# Altium PCB PCB1.PcbDoc
Units mm, origin at the board's own origin, x right, y up, seen from the top; angles counter-clockwise.
Board outline 24.84 x 24.84 mm, 4 copper layers (Top Layer, Layer 1, Layer 2, Bottom Layer), stack 0.603 mm thick; 30 components, 19 nets, 93 pads, 275 vias.
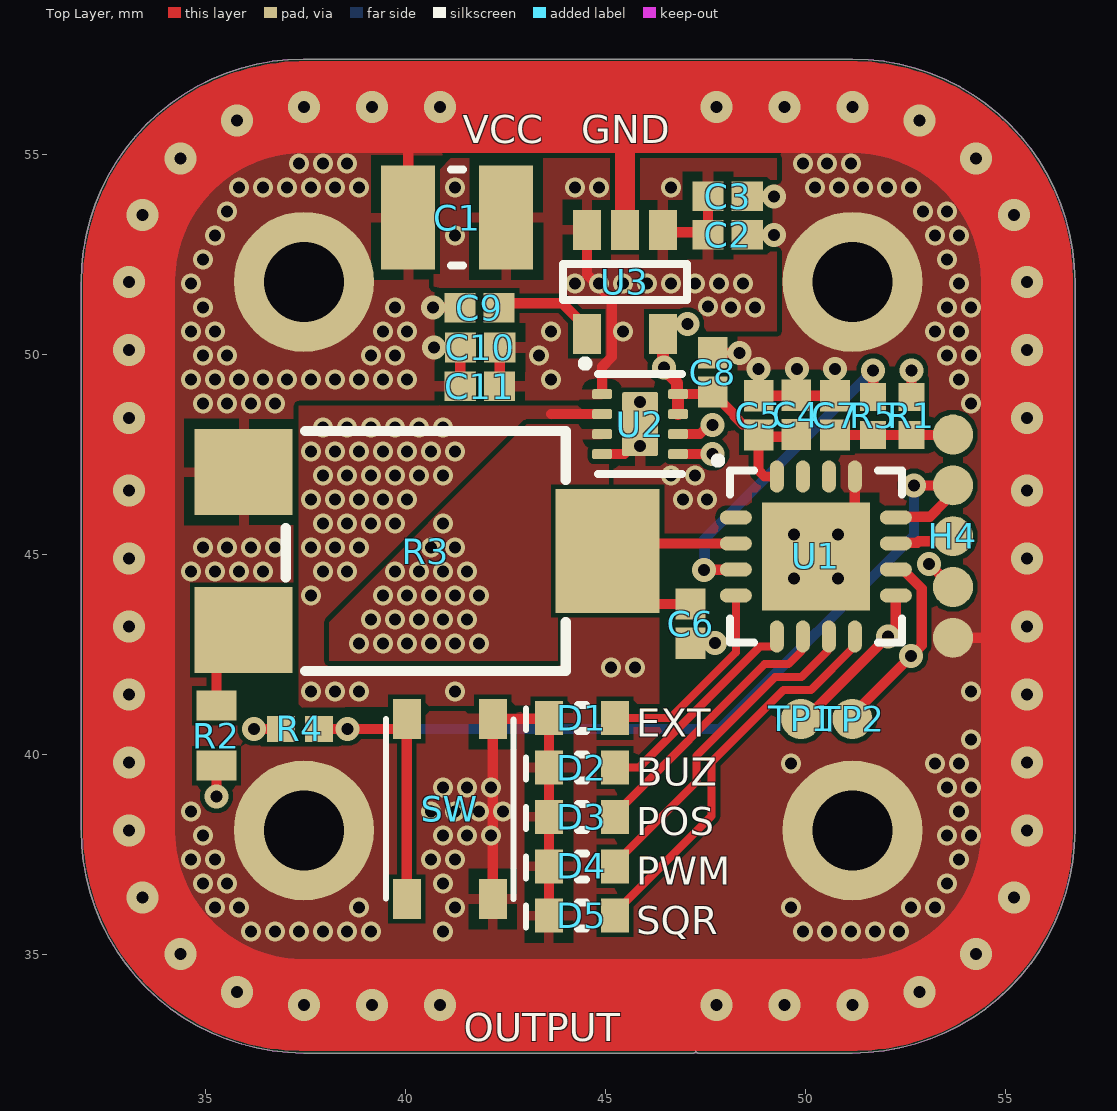
[diagram p0: Top Layer view]
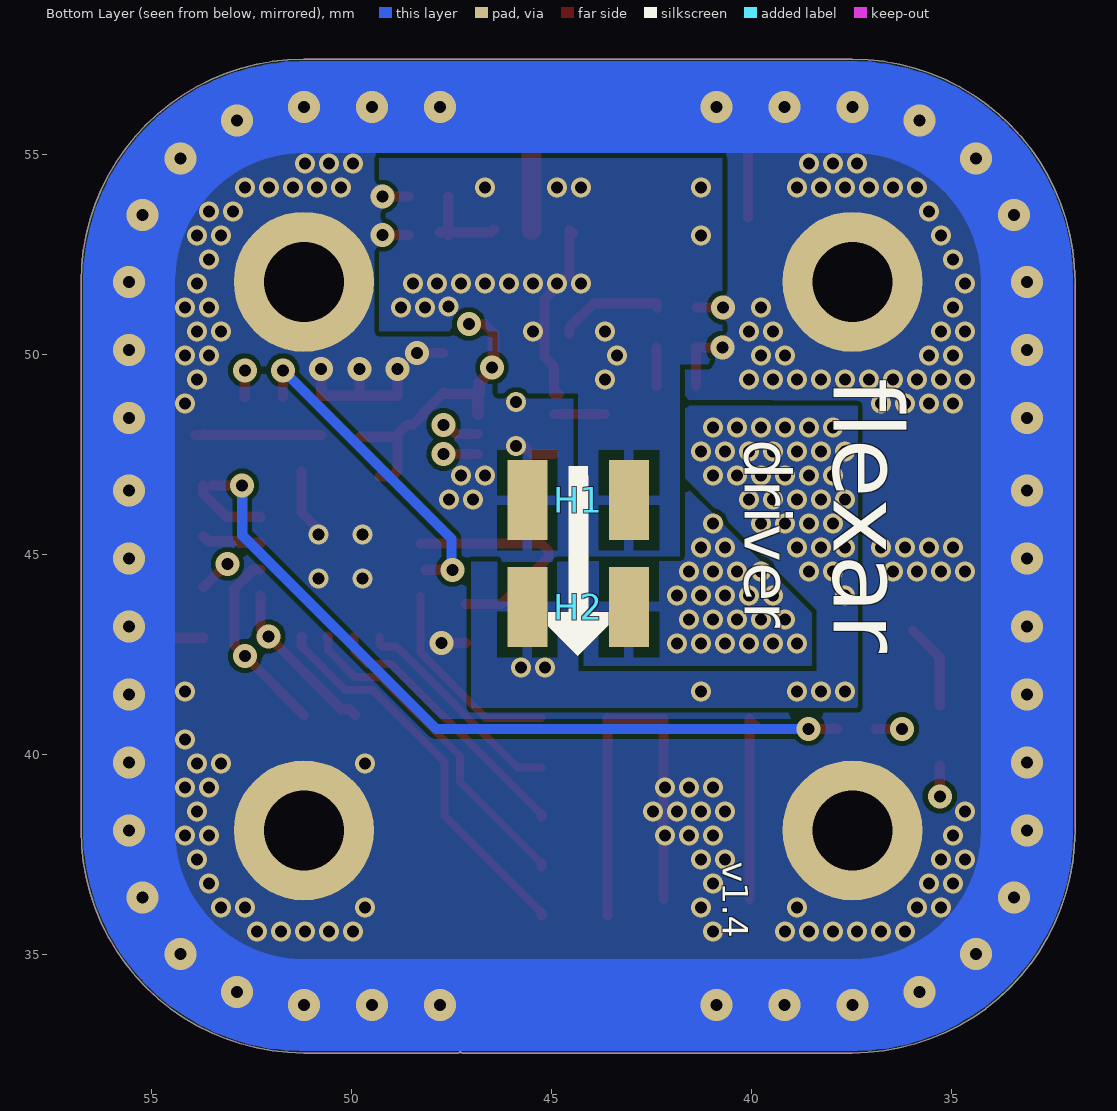
[diagram p1: Bottom Layer view, seen from below]
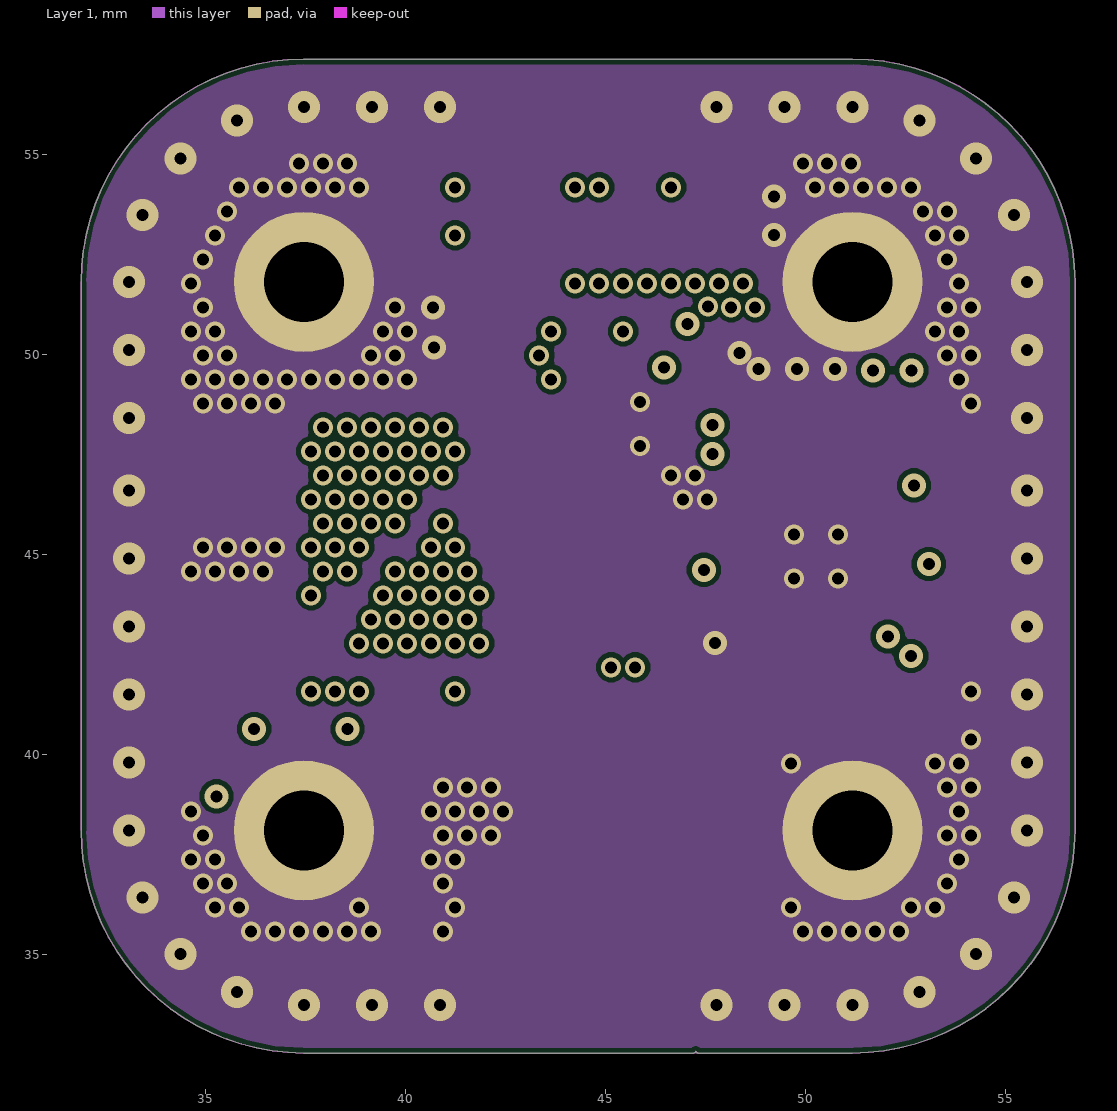
[diagram p2: Layer 1]
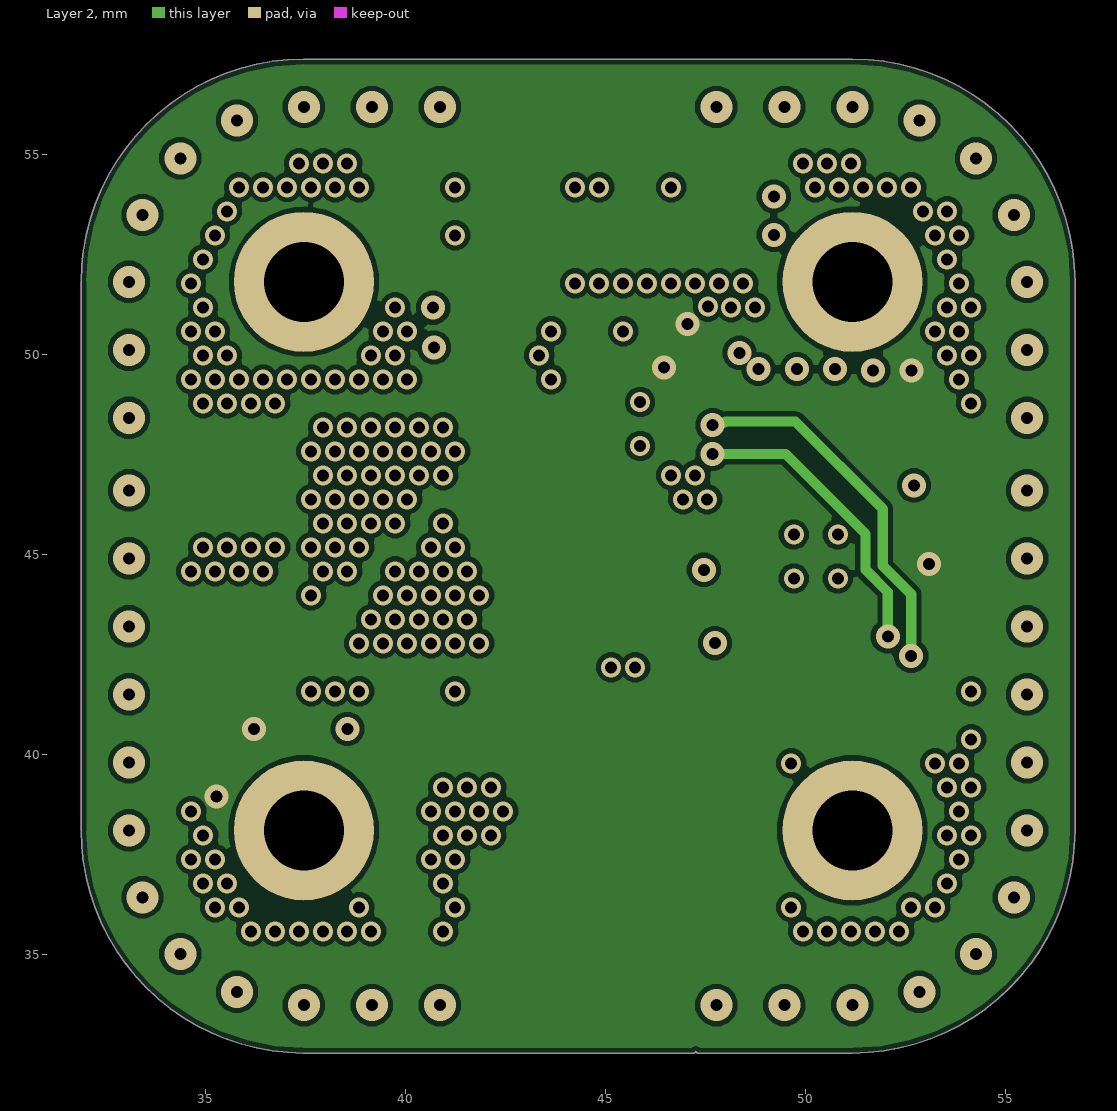
[diagram p3: Layer 2]

## Layer stack, top to bottom
Top Solder: solder mask 0.0102, Solder Resist, Dk 3.5
Top Layer: signal copper 0.0356
Dielectric 1: prepreg 0.0711, PP-006, Dk 4.1
Layer 1: signal copper 0.035
Dielectric: dielectric 0.32, FR-4, Dk 4.8
Layer 2: signal copper 0.035
Dielectric 2: prepreg 0.0711, PP-006, Dk 4.1
Bottom Layer: signal copper 0.0356
Bottom Solder: solder mask 0.0102, Solder Resist, Dk 3.5

## Board outline
37.468,32.537 cw(c37.468,38.103) 31.902,38.103 31.902,51.816 cw(c37.468,51.816) 37.468,57.382 51.181,57.382 cw(c51.181,51.816) 56.747,51.816 56.747,38.103 cw(c51.181,38.103) 51.181,32.537 47.319,32.537 cw(c47.319,32.588) 47.269,32.58 cw(c47.219,32.588) 47.219,32.537

## Design rules (kind name [scope] priority, off if disabled: settings)
Clearance [All] p1: gap=0.122 ignorepadtopadclearanceinfootprint=FALSE
PasteMaskExpansion [All] p1: expansion=-0.1
PlaneConnect [All] p1: planeconnectstyle=Relief reliefexpansion=0.3 reliefentries=4 reliefconductorwidth=0.25 reliefairgap=0.125
PolygonConnect [IsVia] p1: connectstyle=Direct reliefconductorwidth=0.3 reliefentries=4 polygonreliefangle="90 Angle" airgapwidth=0.15
PolygonConnect PolygonConnect_1 [IsRoundPad] p2: connectstyle=Direct reliefconductorwidth=0.3 reliefentries=4 polygonreliefangle="90 Angle" airgapwidth=0.15
PolygonConnect PolygonConnect_5 [All] p3: connectstyle=Relief reliefconductorwidth=0.254 reliefentries=4 polygonreliefangle="90 Angle" airgapwidth=0.254
RoutingVias [All] p1: holewidth=0.711 width=1.27 viastyle="Through Hole" minholewidth=0.3 minwidth=0.4 maxholewidth=5 maxwidth=5
SolderMaskExpansion [All] p1: expansion=0 istentingtop=FALSE
Width [All] p1: maxlimit=2 minlimit=0.152 preferedwidth=0.254
28 further rules are at their usual default settings.

## Components (designator, comment, footprint, x,y, rotation, side; value= is the part's Value field where it differs from the comment)
C1 "47uF" TAYO-C1210-2_L 41.302,53.423 r0 top
C2 "10nF" CAPC1005X56X25ML10T15 48.061,52.991 r180 top
C3 "100nF" CAPC1005X56X25ML10T15 48.061,53.953 r180 top
C4 "10nF" CAPC1005X56X25ML10T15 49.774,48.493 r270 top
C5 "100nF" CAPC1005X56X25ML10T15 48.837,48.478 r270 top
C6 "100nF" CAPC1005X56X25ML10T15 47.134,43.273 r90 top
C7 "100nF" CAPC1005X56X25ML10T15 50.747,48.478 r270 top
C8 "2.2uF" CAPC1005X56X25ML10T15 47.69,49.551 r270 top
C9 "100pF" CAPC1005X56X25ML10T15 41.859,51.171 r0 top
C10 "10nF" CAPC1005X56X25ML10T15 41.877,50.176 r0 top
C11 "100nF" CAPC1005X56X25ML10T15 41.867,49.21 r0 top
D1 "'LTST-C190KFKT" RESC1608X04N 44.419,40.908 r180 top
D2 "'LTST-C190KFKT" RESC1608X04N 44.419,39.674 r180 top
D3 "'LTST-C190KFKT" RESC1608X04N 44.419,38.44 r180 top
D4 "'LTST-C190KFKT" RESC1608X04N 44.419,37.206 r180 top
D5 "'LTST-C190KFKT" RESC1608X04N 44.419,35.972 r180 top
H1 "'BG300-02-A-L-A" BG300-02-A-L-A 45.485,45.163 r180 bottom
H2 "'BG300-02-A-L-A" BG300-02-A-L-A 43.167,44.886 r0 bottom
H4 "H5P1.27" H5P1.27P 53.696,45.458 r270 top
R1 "10k" RESC1005X40X25ML5T10 52.658,48.463 r270 top
R2 "150 (0.33W)" FP-CRCW0603-HPe3-MFG 35.284,40.471 r270 top
R3 "N6L50T0S-503A3030R-E" N6L50T0S-503A3030R-E 40.513,45.085 r180 top
R4 "10k" RESC1005X40X25ML5T10 37.368,40.64 r180 top
R5 "150" RESC1005X40X25ML05T10 51.702,48.463 r90 top
SW "PTS815 SJK 250 SMTR LFS" "PTS815 SJK 250 SMTR LFS" 39.818,38.78 r270 top
TP1 "TESTPAD" TESTPAD 49.897,40.889 r270 top
TP2 "TESTPAD" TESTPAD 51.181,40.889 r270 top
U1 "PIC16F18323-I/JQ" PIC16F18323-I/JQ 50.267,44.95 r0 top
U2 "DRV8837DSGR" FP-DSG0008A-MFG 45.874,48.26 r0 top
U3 "'AP2210K-3.3TRG1" SOT95P282X145-5N 45.493,51.816 r270 top

## Footprints (in the part's own frame and the unit in brackets; to place one, negate y for a bottom-side part, rotate by r counter-clockwise, add the part's x,y. Pads: shape width x height; smd on the part's side, far side on the other; paste and mask are expansions set on the pad)
BG300-02-A-L-A [mm]
  rect 1x2 smd: 1(-0.111,1.195) 2(2.429,1.195)
  body extent -1.71,0.21 3.92,12.16, height 2.5
CAPC1005X56X25ML10T15 [mm] "Chip Capacitor, 2-Leads, Body 1.00x0.50mm, IPC Low Density"
  rect 0.78x0.74 smd: 1(-0.49,0) 2(0.49,0)
  body extent -0.55,-0.3 0.55,0.3, height 0.56
FP-CRCW0603-HPe3-MFG [mm]
  rect 0.75x1 smd paste+0 mask+0: 1(-0.75,0) 2(0.75,0)
  body extent -1.22,-0.6 1.22,0.6, height 0.25
FP-DSG0008A-MFG [mm]
  rrect40% 0.5x0.25 smd paste+0 mask+0: 1(-0.95,0.75) 2(-0.95,0.25) 3(-0.95,-0.25) 4(-0.95,-0.75) 5(0.95,-0.75) 6(0.95,-0.25) 7(0.95,0.25) 8(0.95,0.75)
  rrect11% 0.9x1.6 smd paste-1000 mask+0: 9(0,0)
  silkscreen extent -1.45,-1.25 1.05,1.59, body extent -1.3,-1.15 1.3,1.15, height 0.25
H5P1.27P [mm]
  round 1 smd: 1(-2.54,0) 2(-1.27,0) 3(0,0) 4(1.27,0) 5(2.54,0)
N6L50T0S-503A3030R-E [mm]
  rect 2.6x3.1 smd: 1(-4.55,0)
  rect 2.45x2.15 smd: 2(4.55,1.975) 3(4.55,-1.975)
  silkscreen extent -3.5,-3 3.5,3, body extent -3.63,-3.13 3.62,3.13, height 6.2
PIC16F18323-I/JQ [mm] "QFN, 16-Leads, Body 4.00x4.00mm, Pitch 0.65mm, Thermal Pad 2.70x2.70mm, IPC Medium Density"
  oval 0.8x0.35 smd: 1(-2,0.975) 2(-2,0.325) 3(-2,-0.325) 4(-2,-0.975) 9(2,-0.975) 10(2,-0.325) 11(2,0.325) 12(2,0.975)
  oval 0.35x0.8 smd: 5(-0.975,-2) 6(-0.325,-2) 7(0.325,-2) 8(0.975,-2) 13(0.975,2) 14(0.325,2) 15(-0.325,2) 16(-0.975,2)
  rect 2.7x2.7 smd: 17(0,0)
  silkscreen extent -2.53,-2.15 2.15,2.48, body extent -2,-2 2,2, height 0.55
"PTS815 SJK 250 SMTR LFS" [mm]
  rect 1x0.7 smd: 1(-2.109,2.373) 1(2.391,2.373) 2(-2.109,0.223) 2(2.391,0.223)
  silkscreen extent -2.11,-0.3 2.39,2.89, body extent -2.08,-0.3 2.42,2.9, height 2.4
RESC1005X40X25ML5T10 [mm] "Chip Resistor, 2-Leads, Body 1.05x0.55mm, IPC Low Density"
  rect 0.7x0.65 smd: 1(-0.475,0) 2(0.475,0)
  body extent -0.53,-0.28 0.53,0.28, height 0.4
RESC1005X40X25ML05T10 [mm] "Chip Resistor, 2-Leads, Body 1.00x0.50mm, IPC Low Density"
  rect 0.7x0.65 smd: 1(-0.475,0) 2(0.475,0)
  body extent -0.53,-0.27 0.53,0.28, height 0.4
RESC1608X04N [mm] "Chip Resistor, 2-Leads, Body 1.60x0.80mm, IPC Medium Density"
  rect 0.7x0.85 smd: 1(-0.825,0) 2(0.825,0)
  silkscreen extent -0.1,-0.33 0.1,0.33, body extent -0.8,-0.4 0.8,0.4, height 0.4
SOT95P282X145-5N [mm] "SOT23, 5-Leads, Body 2.96x2.83mm, Pitch 0.95mm, IPC Medium Density"
  rect 1x0.7 smd: 1(-1.3,0.95) 2(-1.3,0) 3(-1.3,-0.95) 4(1.3,-0.95) 5(1.3,0.95)
  silkscreen extent -0.45,-1.55 0.45,1.55, body extent -0.85,-1.55 0.85,1.55, height 1.45
TAYO-C1210-2_L [mm] "Chip Capacitor, 2-Leads, Body 3.50x2.70mm, IPC High Density"
  rect 1.35x2.6 smd: 1(-1.225,0) 2(1.225,0)
  silkscreen extent -0.15,-1.2 0.15,1.2, body extent -1.75,-1.35 1.75,1.35, height 2.7
TESTPAD [mm]
  round 1 smd paste-5: 1(0,0)

## Part data
C1: library part CMP-2000-06559-1, "'CL32A476KOJNNNE", Capacitance=47µF, Manufacturer="Taiyo Yuden", Operating Temperature=-55°C~125°C, Package / Case=1210(3225Metric), Package Description="2-Pin Surface Mount Device, Body 3.2 x 2.5 mm, Height 2.7 mm", Package Reference=C1210, Ratings=-, Standard Package=1, Temperature Coefficient=X7R, Tolerance=±20%, Voltage - Rated=10V, Applications=GeneralPurpose, Category=Capacitors, Datasheet URL=https://datasheet.ciiva.com/142/lmk325b7476mm-tr-ss-142765.pdf, Datasheet Version=10/2014, Family=CeramicCapacitors, Features=-, Height - Seated (Max)=-, Lead Spacing=-, Lead Style=-, Manufacturer URL=http://www.t-yuden.com/, Mounting Technology=SurfaceMount, Mounting Type=SurfaceMount,MLCC, Online Catalog=MSeries, Other Names=587-2783-6, Packaging=Digi-Reel®, Series=M, Size / Dimension="0.126\"Lx0.098\"W(3.20mmx2.50mm)", Thickness (Max)="0.106\"(2.70mm)"
C2 C4 C10: library part CMP-2008-02799-1, "'04025C103MAT2A", Manufacturer="AVX Interconnect / Elco", Part Number=0402YC103MAT2A
C3 C5 C6 C7 C11: library part CMP-2008-02800-1, "'CL05B104KA5NNNC", Manufacturer="AVX Interconnect / Elco", Part Number=0402YC104KAT2A
C8: library part CMP-2008-02800-1, "'LMK105BJ225MV-F", Manufacturer="AVX Interconnect / Elco", Part Number=0402YC104KAT2A
C9: library part CMP-2008-02799-1, "'CC0402KRX7R9BB101", Manufacturer="AVX Interconnect / Elco", Part Number=0402YC103MAT2A
D1 D2 D3 D4 D5: library part LED
H1 H2: library part H2P2.54
R1 R4: library part CMP-2002-07915-2, "'RC0402JR-0710KL", Case Code (Imperial)=0402, Case Code (Metric)=1005, Max Operating Temperature="155 degC", Min Operating Temperature="-55 degC", Package Quantity=10000, Power Rating="63 mW", Resistance="10 kohm", Tolerance=5%, Voltage Rating="50 V", Case\Package=0402, ComponentLink1Description="Manufacturer URL", ComponentLink1URL=http://www.yageo.com/, ComponentLink2Description=Datasheet, ComponentLink2URL=http://www.yageo.com/documents/recent/PYu-RC_Group_51_RoHS_L_04.pdf, DatasheetVersion="Rev. 4, 02/2016", Height="0.35 mm", Length="1 mm", Mount="Surface Mount", Mounting Technology="Surface Mount", PackageDescription="2-Pin Surface Mount Device, Body 1 x 0.5 mm", PackageReference=0402, Packaging="Tape and Reel", Pins=2, REACH SVHC="No SVHC", RoHSCompliant=true, Voltage Rating (DC)="50 V", Width="0.5 mm"
R2: library part CMP-02407-010710-1, "'CRCW0603150RJNEAHP", Case Code (Imperial)=0603, Case Code (Metric)=1608, Max Operating Temperature=155°C, Max Power Dissipation=250mW, Min Operating Temperature=-55°C, Package Quantity=1, Resistance=150R, Temperature Coefficient=100ppm/°C, Tolerance=1%, Voltage Rating=75V, Case/Package=0603, Composition="Thick Film", Contact Plating=Tin, Depth=0.85mm, Features="Automotive AEC-Q200", Height=0.45mm, Lead Free="Lead Free", Length=1.55mm, Military Standard=Not, Mount="Surface Mount", Number of Terminations=2, Packaging="Tape and Reel", Power Rating=250mW, Radiation Hardening=No, Termination=SMD/SMT, Voltage Rating (DC)=75V, Weight=7.1E-05oz, Width=0.033inch
R5: library part CMP-2002-07401-1, "'RC0402FR-07150RL", Manufacturer="Yageo / Phycomp", Part Number=RC0402FR-07150RL
U2: library part CMP-04915-000004-1, "IC MOTOR DRIVER PAR 8WSON", Ambient Temperature Range High=+85°C, Ambient Temperature Range Low=-40°C, Manufacturer="Texas Instruments", Max Junction Temp=+150°C, Max Supply Voltage=7V, Min Supply Voltage=1.8V, Nominal Supply Current=300-700uA, Output Current=1.8A, Output Voltage=0-11V, Package=DSG0008A, Switching Frequency=0-250kHz, Temperature="-40°C to +85°C", Automotive=No, Category=IC, ComponentLink2Description=Datasheet, ComponentLink2URL=http://www.ti.com/lit/ds/symlink/drv8837.pdf, Device Class L1="Integrated Circuits (ICs)", Device Class L2="Power Management ICs", Device Class L3="Motor Drivers", Digikey Description="IC MOTOR DRIVER PAR 8WSON", Height=0.8mm, Lead Free=Yes, Manufacturer Part Number=DRV8837DSGR, Motor Type=Brushed, Mouser Description="Motor / Motion / Ignition Controllers & Drivers 1.8A Low Vltg Brush DC Motor Driver", Number Of Outputs=2, Octopart=https://octopart.com/drv8837dsgr-texas+instruments-23786726, RoHS=TRUE, Standoff Height=0mm, Temperature Range High=+85°C, Temperature Range Low=-40°C
U3: library part AP2210K-3.0TRG1

## Free pads (board coordinates)
  round 3.5 hole 2 mask+0: ""(37.468,38.103) ""(37.468,51.816) ""(51.181,38.103) ""(51.181,51.816)

## Via types
v1: diameter 0.5, hole 0.3, Top Layer to Bottom Layer, tented both sides, 204 vias
v2: diameter 0.8, hole 0.3, Top Layer to Bottom Layer, 42 vias
v3: diameter 0.6, hole 0.3, Top Layer to Bottom Layer, tented both sides, 23 vias
v4: diameter 0.5, hole 0.3, Top Layer to Bottom Layer, tented bottom, 6 vias

## Nets (pads, with @x,y where several pads share a name; then routed paths per layer and width w, separated by ;. In a path a pad name is that pad's centre, name@x,y a point inside that pad or via, vN(x,y) a via of type N, cw(c..) or ccw(c..) an arc to the next point about the centre after c; other vN are vias at no path point)
GND: C1.1 C2.1 C3.1 C4.1 C5.1 C6.1 C7.1 C8.1 C9.1 C10.1 C11.1 D1.2 D2.2 D3.2 D4.2 D5.2 H1.1 H4.5 pad. R3.3 SW.1 U1.13 U1.17 U2.4 U2.9 U3.2 | length 196.5
  Top Layer w0.254: v2(33.099,48.416) 33.919,49.236 ; pad.@37.368,38.103 pad.@37.368,38.242 ; C1.1 40.077,55.394 v2(40.868,56.186) ; v3(40.702,51.171) C9.1 ; v3(40.72,50.176) C10.1 41.377,50.165 C11.1 ; SW.1@42.191,36.389 42.191,40.889 43.575,40.889 D1.2 D2.2 D3.2 D4.2 D5.2 ; U2.4 44.926,47.512 45.476,47.512 45.674,47.71 v4(45.874,47.71) ; 45.493,55.962 45.716,56.186 ; C6.1 v3(47.745,42.783) ; C8.1 v3(48.357,50.041) ; C2.1 v3(49.218,52.991) ; C3.1 v3(49.218,53.953) ; v3(48.837,49.635) C5.1 C4.1@49.792,48.968 ; v3(49.792,49.635) C4.1@49.792,48.968 ; C7.1@50.731,48.985 C7.1 ; v3(50.747,49.635) C7.1 ; U1.17@50.817,45.627 51.242,46.052 U1.13 U1.13@51.242,47.077 ; H4.5 55.118,42.918 55.403,43.203 v2(55.551,43.203) ; C4.1@49.792,48.968 C7.1
  Top Layer w0.5: U3.2 45.493,55.962
  Top Layer w2.3: v2(33.099,38.103) ccw(c37.468,38.103) v2(37.468,33.734) v2(51.181,33.734) ccw(c51.181,38.103) v2(55.551,38.103) v2(55.551,39.803) v2(55.551,41.503) v2(55.551,43.203) v2(55.551,44.903) v2(55.551,46.603) v2(55.551,48.416) v2(55.551,50.116) v2(55.551,51.816) ccw(c51.181,51.816) v2(51.181,56.186) v2(49.481,56.186) v2(47.781,56.186) 45.716,56.186 v2(40.868,56.186) v2(39.168,56.186) v2(37.468,56.186) ccw(c37.468,51.816) v2(33.099,51.816) v2(33.099,50.116) v2(33.099,48.416) v2(33.099,46.603) v2(33.099,44.903) v2(33.099,43.203) v2(33.099,41.503) v2(33.099,39.803) v2(33.099,38.103)
  Bottom Layer w2.3: v2(33.099,38.103) ccw(c37.468,38.103) v2(37.468,33.734) v2(51.181,33.734) ccw(c51.181,38.103) v2(55.551,38.103) v2(55.551,39.803) v2(55.551,41.503) v2(55.551,43.203) v2(55.551,44.903) v2(55.551,46.603) v2(55.551,48.416) v2(55.551,50.116) v2(55.551,51.816) ccw(c51.181,51.816) v2(51.181,56.186) v2(49.481,56.186) v2(47.781,56.186) v2(40.868,56.186) v2(39.168,56.186) v2(37.468,56.186) ccw(c37.468,51.816) v2(33.099,51.816) v2(33.099,50.116) v2(33.099,48.416) v2(33.099,46.603) v2(33.099,44.903) v2(33.099,43.203) v2(33.099,41.503) v2(33.099,39.803) v2(33.099,38.103)
  other v1: 36.153,35.58 36.753,35.58 37.353,35.58 37.953,35.58 38.553,35.58 39.153,35.58 40.953,35.58 49.953,35.58 50.553,35.58 51.153,35.58 51.753,35.58 52.353,35.58 35.253,36.18 35.853,36.18 38.853,36.18 41.253,36.18 49.653,36.18 52.653,36.18 53.253,36.18 34.953,36.78 35.553,36.78 40.953,36.78 53.553,36.78 34.653,37.38 35.253,37.38 40.653,37.38 41.253,37.38 53.853,37.38 34.953,37.98 40.953,37.98 41.553,37.98 42.153,37.98 53.553,37.98 54.153,37.98 34.653,38.58 40.653,38.58 41.253,38.58 41.853,38.58 42.453,38.58 53.853,38.58 40.953,39.18 41.553,39.18 42.153,39.18 53.553,39.18 54.153,39.18 49.653,39.78 53.253,39.78 53.853,39.78 54.153,40.38 54.153,41.58 34.653,44.58 35.253,44.58 35.853,44.58 36.453,44.58 34.953,45.18 35.553,45.18 36.153,45.18 36.753,45.18 46.953,46.38 47.553,46.38 46.653,46.98 47.253,46.98 34.953,48.78 35.553,48.78 36.153,48.78 36.753,48.78 54.153,48.78 34.653,49.38 35.253,49.38 35.853,49.38 36.453,49.38 37.053,49.38 37.653,49.38 38.253,49.38 38.853,49.38 39.453,49.38 40.053,49.38 53.853,49.38 34.953,49.98 35.553,49.98 39.153,49.98 39.753,49.98 53.553,49.98 54.153,49.98 34.653,50.58 35.253,50.58 39.453,50.58 40.053,50.58 53.253,50.58 53.853,50.58 34.953,51.18 39.753,51.18 53.553,51.18 54.153,51.18 34.653,51.78 53.853,51.78 34.953,52.38 53.553,52.38 35.253,52.98 53.253,52.98 53.853,52.98 35.553,53.58 52.953,53.58 53.553,53.58 35.853,54.18 36.453,54.18 37.053,54.18 37.653,54.18 38.253,54.18 38.853,54.18 50.253,54.18 50.853,54.18 51.453,54.18 52.053,54.18 52.653,54.18 37.353,54.78 37.953,54.78 38.553,54.78 49.953,54.78 50.553,54.78 51.153,54.78
  other v2: 39.168,33.734 40.868,33.734 47.781,33.734 49.481,33.734 35.796,34.066 52.853,34.066 34.378,35.013 54.271,35.013 33.431,36.431 55.218,36.431 33.431,53.488 55.218,53.488 34.378,54.906 54.271,54.906 35.796,55.853 52.853,55.853
  other v4: 49.717,44.4 50.817,44.4 49.717,45.5 50.817,45.5 45.874,48.81
NetC6_2: C6.2 R3.1 U1.2 | length 6
  Top Layer w0.254: C6.2 46.236,43.763 45.063,44.936 R3.1 45.253,45.275 U1.2
NetC7_2: C7.2 H4.1 R1.2 R5.1 | length 3.2
  Top Layer w0.254: C7.2 R5.1 R1.2 H4.1@53.892,47.988 ; H4.1 53.689,48.005 H4.1@53.696,48.005
NetC9_2: C9.2 U3.4 | length 2.6
  Top Layer w0.254: C9.2@42.349,51.282 43.927,51.282 44.543,50.666 U3.4
NetD1_1: D1.1 U1.4 | length 5.1
  Top Layer w0.2: D1.1 46.625,40.908 48.267,42.55 U1.4
NetD2_1: D2.1 U1.5 | length 5.5
  Top Layer w0.2: D2.1 45.846,39.674 48.868,42.696 49.223,42.696 49.292,42.766 U1.5
NetD3_1: D3.1 U1.6 | length 6.8
  Top Layer w0.2: D3.1@45.244,38.515 48.987,42.258 49.584,42.258 49.913,42.587 49.913,42.921 U1.6
  Top Layer w0.254: D3.1 D3.1@45.244,38.515
NetD4_1: D4.1 U1.7 | length 8.3
  Top Layer w0.2: D4.1@45.244,37.281 47.283,39.32 47.283,39.967 49.253,41.936 49.912,41.936 50.574,42.598 U1.7@50.574,42.932
  Top Layer w0.254: D4.1 D4.1@45.244,37.281 ; U1.7@50.574,42.932 U1.7
NetD5_1: D5.1 U1.8 | length 9.9
  Top Layer w0.2: D5.1@45.244,36.047 47.659,38.462 47.659,39.811 49.463,41.614 50.147,41.614 U1.8@51.242,42.709
  Top Layer w0.254: D5.1 D5.1@45.244,36.047 ; U1.8@51.242,42.709 U1.8
NetH2_1: H2.1 U2.3
  other v1: 38.853,42.78 39.453,42.78 40.053,42.78 40.653,42.78 41.253,42.78 41.853,42.78 39.153,43.38 39.753,43.38 40.353,43.38 40.953,43.38 41.553,43.38 39.453,43.98 40.053,43.98 40.653,43.98 41.253,43.98 41.853,43.98 39.753,44.58 40.353,44.58 40.953,44.58 41.553,44.58 40.653,45.18 41.253,45.18 40.953,45.78
NetH2_2: H2.2 U2.2 | length 1.3
  Top Layer w0.254: 43.653,48.51 U2.2
  other v1: 37.653,41.58 38.253,41.58 38.853,41.58 41.253,41.58 45.153,42.18 45.753,42.18 37.653,43.98 37.953,44.58 38.553,44.58 37.653,45.18 38.253,45.18 38.853,45.18 37.953,45.78 38.553,45.78 39.153,45.78 39.753,45.78 37.653,46.38 38.253,46.38 38.853,46.38 39.453,46.38 40.053,46.38 37.953,46.98 38.553,46.98 39.153,46.98 39.753,46.98 40.353,46.98 40.953,46.98 37.653,47.58 38.253,47.58 38.853,47.58 39.453,47.58 40.053,47.58 40.653,47.58 41.253,47.58 37.953,48.18 38.553,48.18 39.153,48.18 39.753,48.18 40.353,48.18 40.953,48.18
NetH4_2: H4.2 R4.1 SW.2 U1.12 | length 26.9
  Top Layer w0.254: R4.1 R4.1@37.893,40.64 ; R4.1@37.91,40.657 R4.1@37.893,40.64 ; SW.2@40.041,36.389 SW.2@40.041,40.863 ; SW.2@40.041,40.889 SW.2@40.041,40.863 ; U1.12 52.285,45.943 53.122,45.943 53.271,46.092 53.271,46.101 53.696,46.526 H4.2 ; v3(52.722,46.728) H4.2@53.483,46.728 ; R4.1@37.893,40.64 v3(38.56,40.64) 39.818,40.64 SW.2@40.041,40.863
  Bottom Layer w0.254: v3(38.56,40.64) 47.879,40.64 52.722,45.483 v3(52.722,46.728)
NetH4_3: H4.3 U1.11 | length 1.5
  Top Layer w0.254: U1.11 52.285,45.293 52.801,45.293 52.84,45.332 53.57,45.332 H4.3
NetR2_1: R2.1 R3.2 | length 2.2
  Top Layer w0.254: R2.1 35.284,42.431 R3.2@35.953,43.1
NetR5_2: R5.2 U1.3 | length 8.1
  Top Layer w0.254: v3(47.468,44.618) U1.3@48.135,44.618 ; R5.2 v3(51.702,49.605)
  Bottom Layer w0.254: v3(47.468,44.618) 47.49,44.639 47.49,45.393 v3(51.702,49.605)
NetTP1_1: TP1.1 U1.9 U2.5 | length 12.4
  Top Layer w0.254: U2.5 47.683,47.51 v3(47.688,47.515) ; TP1.1@49.897,40.989 50.04,41.132 50.249,41.132 v3(52.067,42.95) 52.267,43.15 U1.9
  Layer 2 w0.254: v3(47.688,47.515) 49.508,47.515 51.512,45.511 51.512,44.616 52.067,44.061 v3(52.067,42.95)
NetTP2_1: TP2.1 U1.10 U2.6 | length 14.9
  Top Layer w0.254: U2.6 46.826,48.012 47.371,48.012 47.596,48.237 v3(47.69,48.237) ; TP2.1@51.181,40.989 v3(52.653,42.461) 52.916,42.724 52.916,44.151 52.51,44.556 52.51,44.581 52.466,44.625 U1.10
  Layer 2 w0.254: v3(47.69,48.237) 47.756,48.303 47.988,48.303 48.011,48.326 49.757,48.326 51.942,46.141 51.942,44.718 52.653,44.007 v3(52.653,42.461)
VCC: C1.2 C2.2 C3.2 C10.2 C11.2 H1.2 U2.1 U3.1 U3.3 | length 7.9
  Top Layer w0.254: C11.2 42.367,49.22 C10.2 ; U3.3@44.46,53.033 U3.3 44.543,52.004 45.166,51.381 45.166,49.937 44.924,49.695 44.924,49.386 U2.1@44.924,49.133 ; U2.1@44.801,49.012 44.803,49.01 U2.1 ; U3.1@46.433,53.126 U3.1 46.502,53.057 C2.2@47.571,53.057 ; C2.2 C2.2@47.571,53.057 ; C3.2 C2.2@47.571,53.057 ; C2.2@47.783,53.057 C2.2@47.571,53.057
  other v1: 43.653,49.38 43.353,49.98 43.653,50.58 45.453,50.58 48.153,51.18 48.753,51.18 47.57,51.195 44.253,51.78 44.853,51.78 45.453,51.78 46.053,51.78 46.653,51.78 47.253,51.78 47.853,51.78 48.453,51.78 41.253,52.98 41.253,54.18 44.253,54.18 44.853,54.18 46.653,54.18
VDD: C4.2 C5.2 C8.2 H4.4 R1.1 R2.2 R4.2 U1.16 U2.7 U2.8 U3.5 | length 11.7
  Top Layer w0.254: v3(35.284,38.954) R2.2 ; v3(36.226,40.64) R4.2 R4.2@36.877,40.623 ; U3.5@46.443,50.441 46.459,50.425 46.459,49.69 v3(46.476,49.673) ; U3.5 46.443,50.539 46.666,50.762 v3(47.057,50.762) ; U2.7 U2.7@46.826,48.508 ; U2.8 47.638,49.01 C8.2 47.69,49.041 48.218,48.513 48.218,48.485 48.239,48.464 48.239,48.455 48.442,48.251 48.594,48.251 48.837,48.008 C5.2 C5.2@48.837,47.943 ; U1.16 48.986,46.95 48.837,47.099 C5.2@48.837,47.943 ; C4.2@49.774,47.943 C5.2@48.837,47.943 ; R1.1 v3(52.658,49.605) ; v3(53.091,44.762) 53.106,44.762 53.681,44.188 H4.4
  Top Layer w0.3: U3.5 46.443,49.649 46.799,49.293 46.799,49.035 U2.8 U2.7
  Bottom Layer w0.254: v3(35.284,38.954) v3@35.315,38.985
  Bottom Layer w0.3: v3@53.051,44.762 v3(53.091,44.762) ; v3@53.099,44.772 v3@53.148,44.821
pads on no net: U1.1 U1.14 U1.15

## Polygon pours and split planes (outlines as drawn)
VCC on Bottom Layer "VCC_L04_P069" (solid, pour order 69): 41.265,55.025 40.72,55.025 40.72,54.48 40.72,49.754 41.783,49.754 41.783,44.958 44.319,44.958 44.319,49.032 46.336,49.032 46.336,50.58 49.292,50.58 49.292,55.045
GND on Bottom Layer "GND_L04_P085" (solid, pour order 85): 35.796,55.025 35.889,55.118 54.61,55.118 54.61,34.544 54.483,34.671 33.909,34.671 33.909,55.118
NetH2_2 on Bottom Layer "NETH2_2_L04_P077" (solid, pour order 77): 44.924,48.745 44.924,48.01 42.761,48.01 38.354,43.603 38.354,42.085 44.319,42.085 44.319,44.823 46.99,44.823 46.99,41.17 45.244,41.17 37.338,41.17 37.338,48.715
NetH2_1 on Bottom Layer "NETH2_1_L04_P079" (solid, pour order 79): 45.086,48.137 45.086,46.675 45.124,46.637 44.323,46.637 44.323,42.085 38.1,42.085 38.1,43.309 42.923,48.136
VCC on Top Layer "VCC_L01_P070" (solid, pour order 70): 41.265,55.025 40.72,54.48 40.72,48.852 46.156,48.852 46.336,49.032 46.336,50.58 49.292,50.58 49.292,55.045
GND on Top Layer "GND_L01_P084" (solid, pour order 84): 35.632,55.025 35.725,55.118 54.446,55.118 54.446,34.544 54.319,34.671 33.745,34.671 33.745,55.118
NetH2_2 on Top Layer "NETH2_2_L01_P081" (solid, pour order 81): 44.924,48.745 44.924,48.01 42.761,48.01 38.354,43.603 38.354,42.338 43.81,42.338 43.81,43.48 46.355,43.48 46.355,41.274 37.338,41.17 37.338,48.715
NetH2_1 on Top Layer "NETH2_1_L01_P080" (solid, pour order 80): 45.086,48.261 45.086,46.675 45.124,46.637 43.81,46.637 43.81,42.338 38.1,42.338 38.1,43.309 43.046,48.259
no net on Bottom Overlay "NONET_L01_P-001" (solid): 43.567,43.557 43.571,43.561 45.075,43.561 45.075,43.211 44.338,42.473 43.576,43.236
no net on Bottom Overlay "NONET_L01_P-001" (solid): 43.875,43.305 44.764,43.305 44.319,42.861
GND on Layer 1 "GND_L02_P086" (solid, pour order 86): 38.153,57.382 51.244,57.382 cw(c51.244,51.879) 56.747,51.879 56.747,38.103 cw(c51.051,38.103) 51.051,32.407 38.151,32.407 cw(c37.896,38.686) 33.636,34.066 cw(c38.31,38.454) 31.902,38.656 31.902,51.816 cw(c37.468,51.816) 37.468,57.382
VDD on Layer 2 "VDD_L03_P083" (solid, pour order 83): 38.153,57.382 51.244,57.382 cw(c51.244,51.879) 56.747,51.879 56.747,38.103 cw(c51.051,38.103) 51.051,32.407 38.151,32.407 cw(c37.896,38.686) 33.636,34.066 cw(c38.31,38.454) 31.902,38.656 31.902,51.816 cw(c37.468,51.816) 37.468,57.382

## Keep-outs
Keep-Out Layer:
  the board outline again, w0.01

## Silkscreen, mask and mechanical layers (free items; w line width, h text height)
Top Overlay:
  lines w0.15: 43.025,35.671 43.025,36.219 ; 43.025,36.905 43.025,37.453 ; 43.025,38.139 43.025,38.687 ; 43.025,39.373 43.025,39.921 ; 43.025,40.607 43.025,41.155
  text "VCC" at 41.442,55.04 h1.2
  text "GND" at 44.405,55.04 h1.2
  text "EXT" at 45.778,40.209 h1.2
  text "BUZ" at 45.778,38.975 h1.2
  text "POS" at 45.778,37.741 h1.2
  text "PWM" at 45.778,36.507 h1.2
  text "SQR" at 45.778,35.273 h1.2
  text "OUTPUT" at 41.468,32.589 h1.2
Bottom Overlay:
  rectangle: 44.074,46.637 44.563,47.217
  lines w0.5: 44.319,43.305 44.319,46.925 ; 43.875,43.305 44.319,42.861 44.764,43.305 43.875,43.305
  text "flexar" at 38.508,49.4 h3 r90
  text "driver" at 40.54,47.879 h2 r90
  text "v1.4" at 40.924,37.315 h1.1 r90
  text "+" at 33.999,-27.528 h1 r180
Top Solder:
  drawing of 29 lines, arcs and shapes, not listed
Bottom Solder:
  region: 49.477,57.346 47.384,57.346 47.384,55.042 49.477,55.042
  rectangle: 39.173,55.025 41.265,57.329
  region: 49.477,34.894 47.384,34.894 47.384,32.59 49.477,32.59
  rectangle: 39.173,32.573 41.265,34.877
  lines w2.3: 40.088,33.734 37.468,33.734 cw(c37.468,38.103) 33.099,38.103 33.099,51.816 cw(c37.468,51.816) 37.468,56.186 40.088,56.186 ; 48.561,33.734 51.181,33.734 ccw(c51.181,38.103) 55.551,38.103 55.551,51.816 ccw(c51.181,51.816) 51.181,56.186 48.561,56.186
Mechanical 1:
  lines w0.1: 31.953,47.954 31.953,51.816 cw(c37.468,51.816) 37.468,57.331 41.331,57.331 ; 31.953,48.26 31.953,38.103 ccw(c37.468,38.103) 37.468,32.588 41.331,32.588 44.27,32.588 47.219,32.588 ; 37.568,57.331 41.43,57.331 44.379,57.331 47.319,57.331 51.181,57.331 cw(c51.181,51.816) 56.696,51.816 56.696,47.954 56.696,38.103 cw(c51.181,38.103) 51.181,32.588 47.319,32.588